# Altium PCB pcb.PcbDoc
Units mil, origin at the board's own origin, x right, y up, seen from the top; angles counter-clockwise.
Board outline 3255 x 4715 mil, 2 copper layers (Top Layer, Bottom Layer); 153 components, 104 nets, 440 pads, 0 vias.
Unrouted connection lines stored in the file: 21.
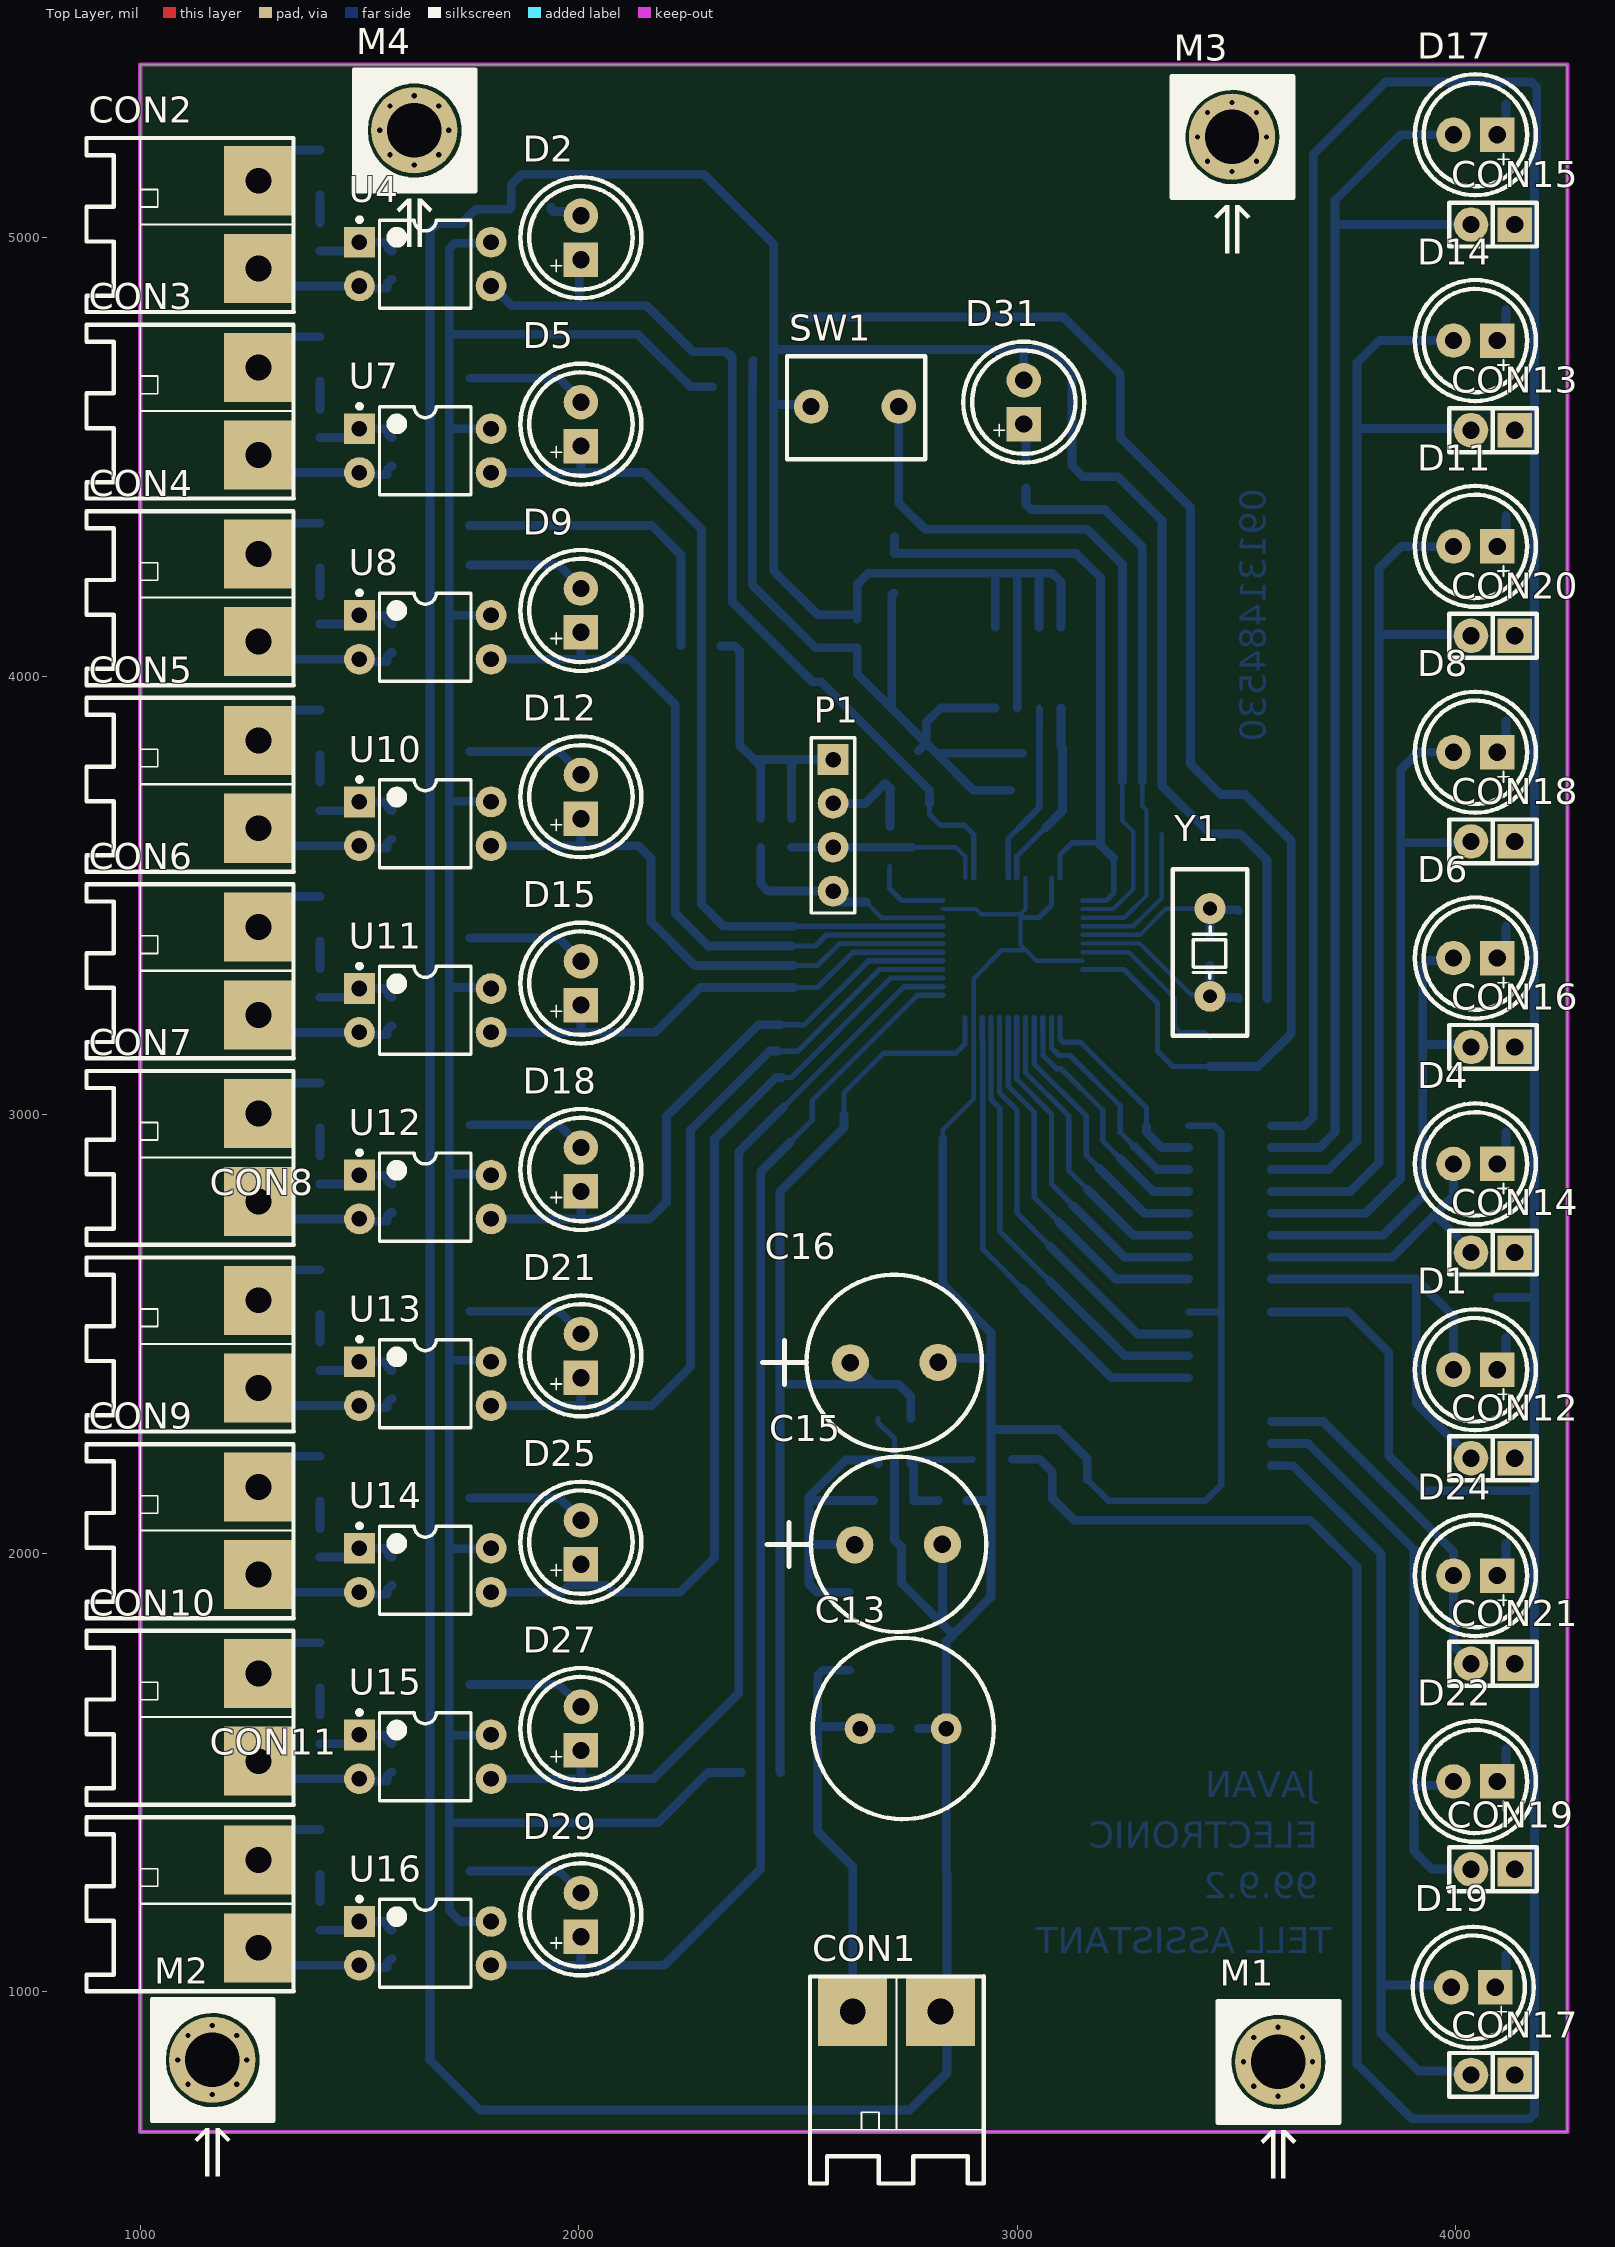
[diagram p0: Top Layer view]
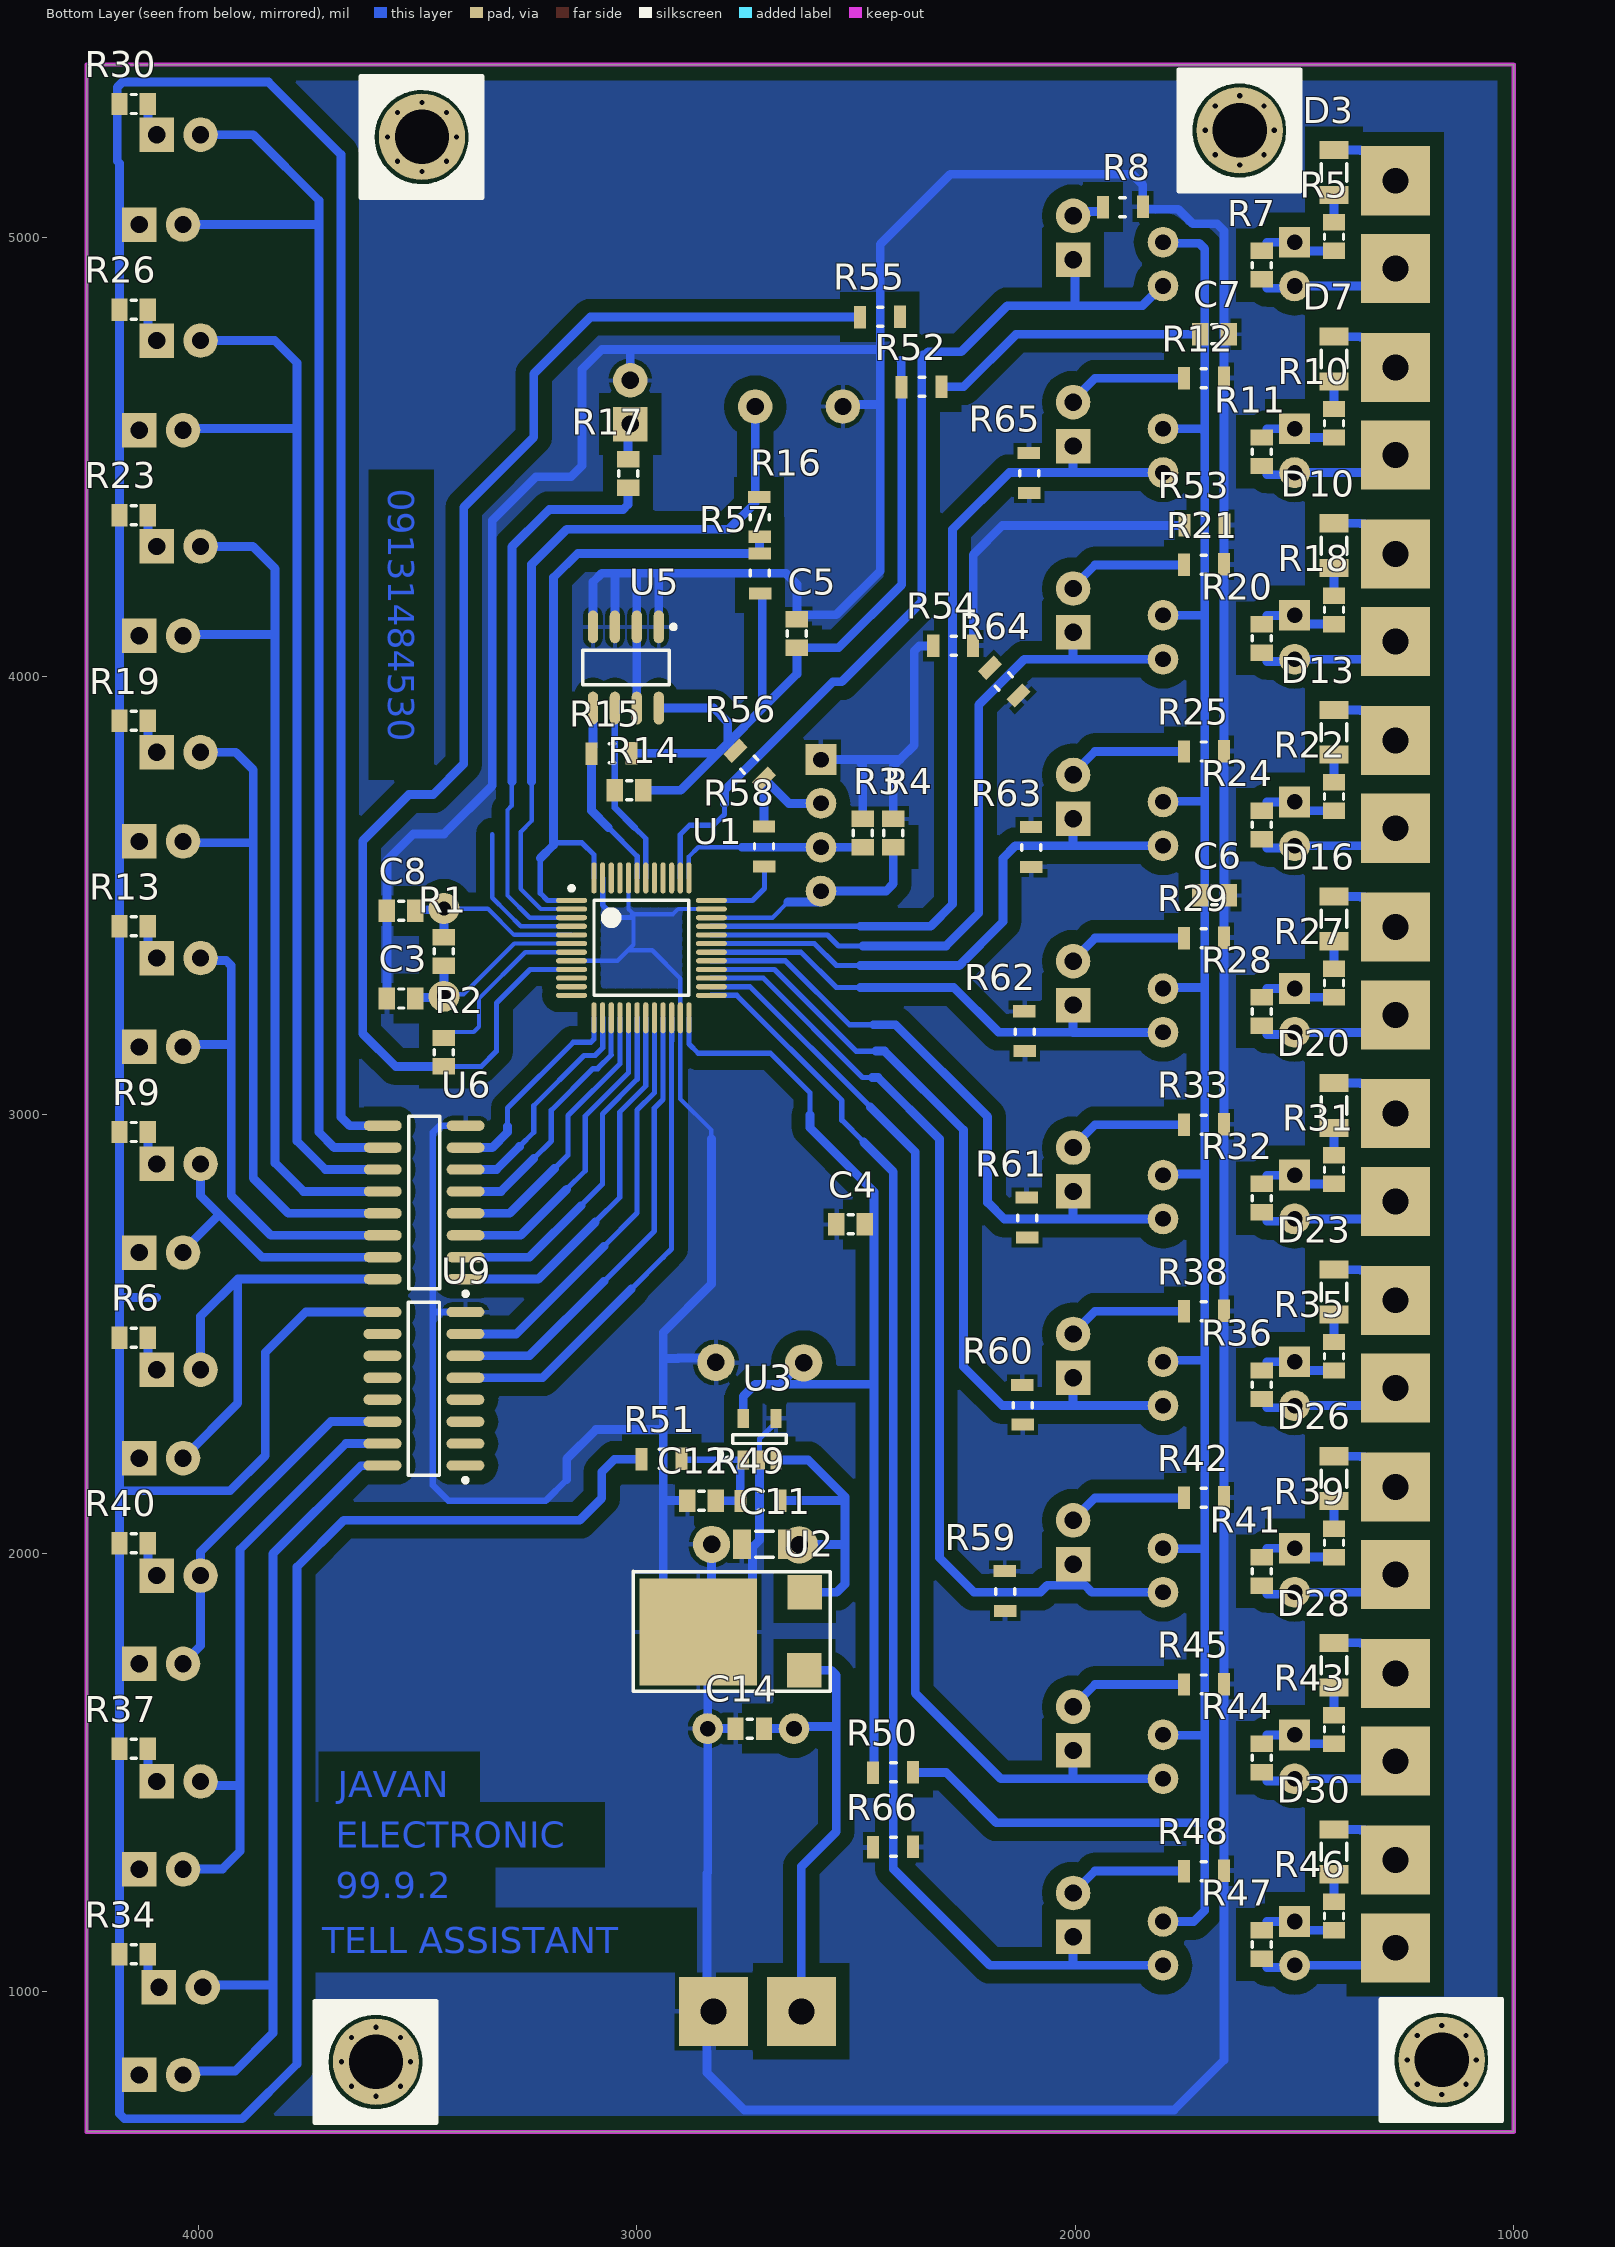
[diagram p1: Bottom Layer view, seen from below]
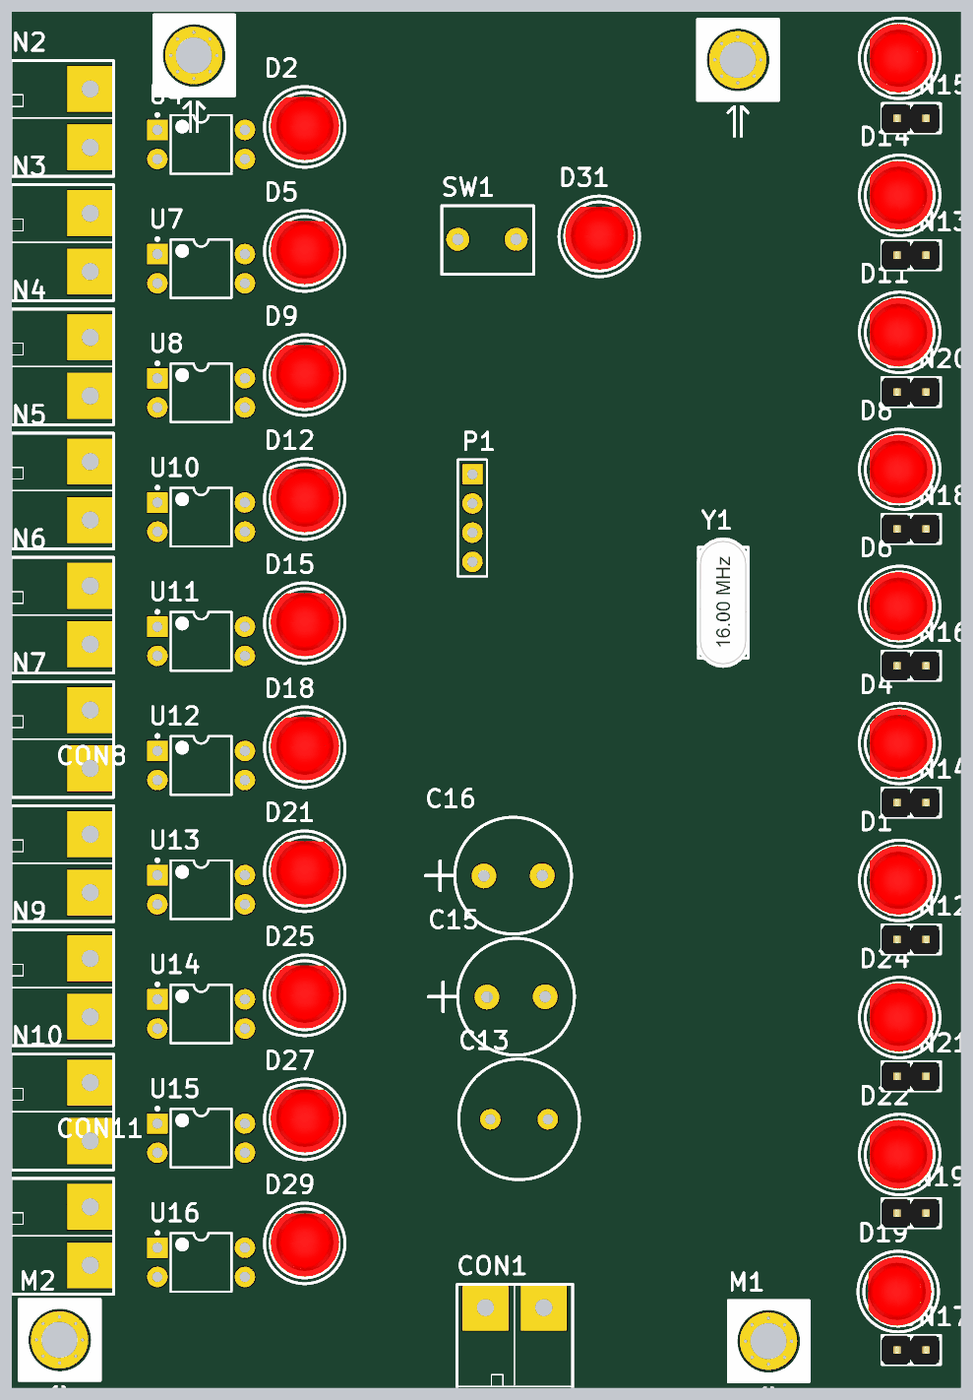
[diagram p2: 3D render of the assembled board from above, using the file's embedded part models]
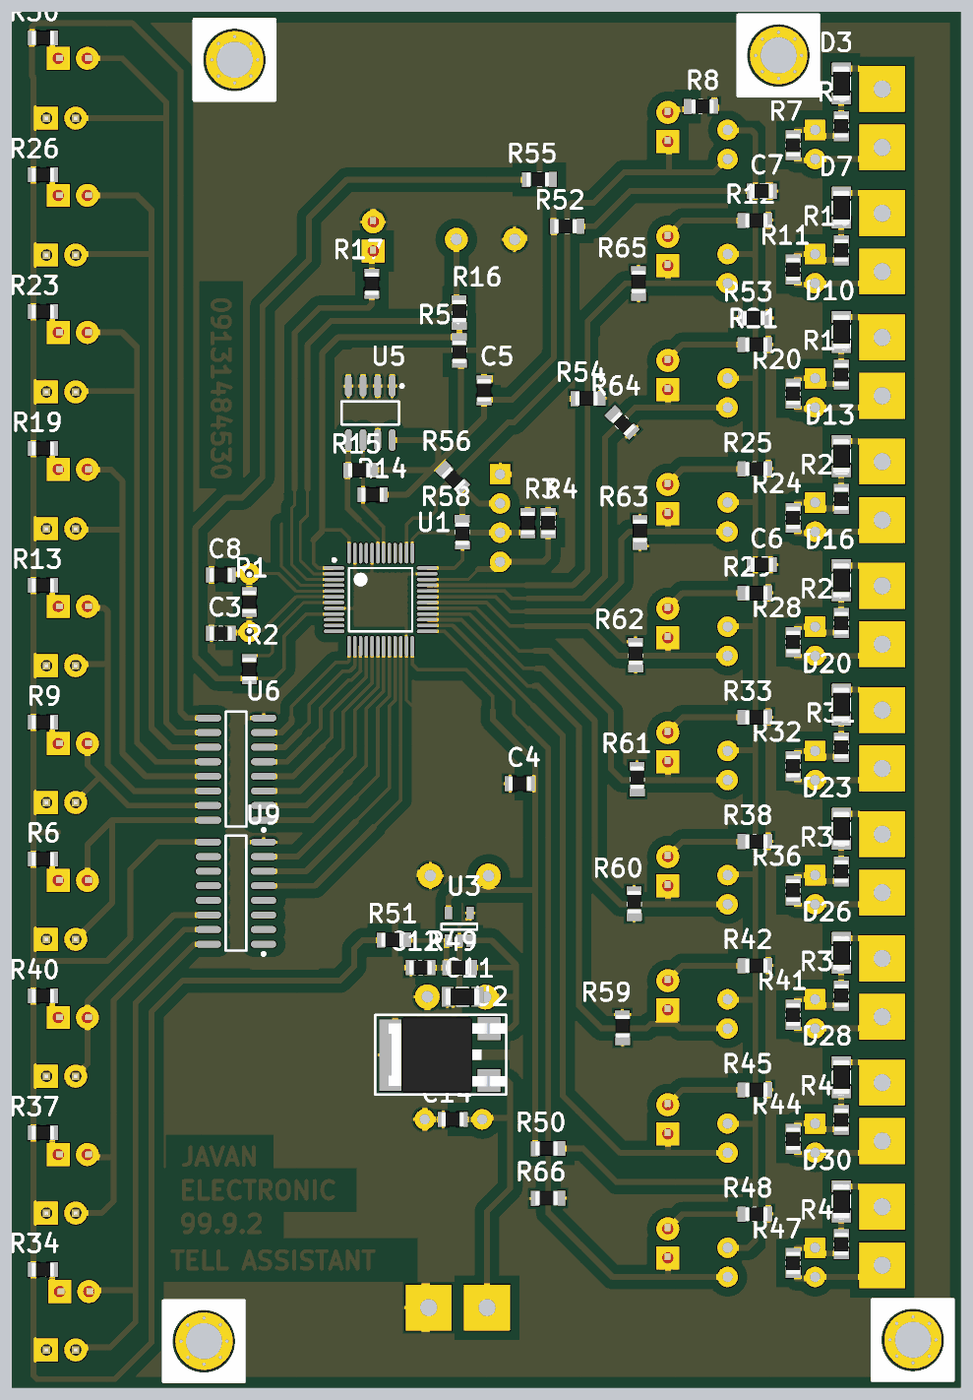
[diagram p3: 3D render of the assembled board from below, using the file's embedded part models]

## Layer stack, top to bottom
Top Solder: solder mask 0.4, Solder Resist, Dk 3.5
Top Layer: signal copper 1.4
Dielectric 1: dielectric 12.6, FR-4, Dk 4.8
Bottom Layer: signal copper 1.4
Bottom Solder: solder mask 0.4, Solder Resist, Dk 3.5

## Board outline
1000,680 4255,680 4255,5395 1000,5395

## Design rules (kind name [scope] priority, off if disabled: settings)
Clearance [All] p1: gap=32 ignorepadtopadclearanceinfootprint=FALSE
PolygonConnect [All] p1: connectstyle=Relief reliefconductorwidth=10 reliefentries=4 polygonreliefangle="90 Angle" airgapwidth=10
RoutingVias [All] p1: holewidth=28 width=50 viastyle="Through Hole" minholewidth=28 minwidth=50 maxholewidth=28 maxwidth=50
SolderMaskExpansion [All] p1: expansion=4 istentingtop=FALSE
Width [All] p1: maxlimit=100 minlimit=10 preferedwidth=20
30 further rules are at their usual default settings.

## Classes and differential pairs
component class comicition: CON2 CON3 CON4 CON5 CON6 CON7 CON8 CON9 CON10 CON11 CON12 CON13 CON14 CON15 CON16 CON17 CON18 CON19 CON20 CON21 D1 D2 D3 D4 D5 D6 D7 D8 D9 D10 D11 D12 D13 D14 D15 D16 D17 D18 D19 D20 D21 D22 D23 D24 D25 D26 D27 D28 D29 D30 R5 R6 R7 R8 R9 R10 R11 R12 R13 R18 R19 R20 R21 R22 R23 R24 R25 R26 R27 R28 R29 R30 R31 R32 R33 R34 R35 R36 R37 R38 R39 R40 R41 R42 R43 R44 R45 R46 R47 R48 U4 U6 U7 U8 U9 U10 U11 U12 U13 U14 U15 U16
component class key: R16 SW1
component class power: C11 C12 C13 C14 C15 C16 CON1 U2 U3
component class Memory: R14 R15 U5
component class main: C3 C4 C5 C6 C7 C8 D31 M1 M2 M3 M4 P1 R1 R2 R3 R4 R17 R49 R50 R51 R52 R53 R54 R55 R56 R57 R58 R59 R60 R61 R62 R63 R64 R65 R66 U1 Y1

## Components (designator, comment, footprint, x,y, rotation, side; value= is the part's Value field where it differs from the comment)
C3 "" "RES 0805 (2012X06L)" 3505.04,3265 r0 bottom value=20pf
C4 "" "RES 0805 (2012X06L)" 2545,2750 r180 bottom
C5 "" "RES 0805 (2012X06L)" 2635,4130 r270 bottom
C6 "" "RES 0805 (2012X06L)" 1650,3500 r0 bottom
C7 "" "RES 0805 (2012X06L)" 1650,4780 r0 bottom
C8 "" "RES 0805 (2012X06L)" 3505,3465 r0 bottom value=20pf
C11 "Non Polarity" "RES 1206 (3216X08L)" 2760,2020 r180 bottom
C12 "Non Polarity" "RES 0805 (2012X06L)" 2884.96,2120 r180 bottom
C13 "Polarity" RB5-10.5 2740,1600 r0 top
C14 "Non Polarity" "RES 0805 (2012X06L)" 2775,1600 r180 bottom
C15 "Polarity" RB5-10 2730,2020 r180 top
C16 "Polarity" RB5-10 2720,2435 r180 top
CON1 "PHOENIX 2" "phonix 2" 2524.88,1035 r0 top
CON2 "PHOENIX 2" "phonix 2" 1350,5230 r270 top
CON3 "PHOENIX 2" "phonix 2" 1350,4804.46 r270 top
CON4 "PHOENIX 2" "phonix 2" 1350,4378.92 r270 top
CON5 "PHOENIX 2" "phonix 2" 1350,3953.37 r270 top
CON6 "PHOENIX 2" "phonix 2" 1350,3527.83 r270 top
CON7 "PHOENIX 2" "phonix 2" 1350,3102.29 r270 top
CON8 "PHOENIX 2" "phonix 2" 1350,2676.75 r270 top
CON9 "PHOENIX 2" "phonix 2" 1350,2251.21 r270 top
CON10 "PHOENIX 2" "phonix 2" 1350,1825.67 r270 top
CON11 "PHOENIX 2" "phonix 2" 1350,1400.12 r270 top
CON12 "PIN 2" "PIN 2" 4135,2216.67 r270 top
CON13 "PIN 2" "PIN 2" 4135,4561.11 r270 top
CON14 "PIN 2" "PIN 2" 4135,2685.56 r270 top
CON15 "PIN 2" "PIN 2" 4135,5030 r270 top
CON16 "PIN 2" "PIN 2" 4135,3154.44 r270 top
CON17 "PIN 2" "PIN 2" 4135,810 r270 top
CON18 "PIN 2" "PIN 2" 4135,3623.33 r270 top
CON19 "PIN 2" "PIN 2" 4135,1278.89 r270 top
CON20 "PIN 2" "PIN 2" 4135,4092.22 r270 top
CON21 "PIN 2" "PIN 2" 4135,1747.78 r270 top
D1 "LED" "led 5mm" 4095,2418.33 r180 top
D2 "LED" "led 5mm" 2005,4950 r90 top
D3 "1N4007" "RES 1206 (3216X08L)" 1410,5200 r270 bottom
D4 "LED" "led 5mm" 4095,2887.78 r180 top
D5 "LED" "led 5mm" 2005,4525 r90 top
D6 "LED" "led 5mm" 4095,3357.22 r180 top
D7 "1N4007" "RES 1206 (3216X08L)" 1410,4774.44 r270 bottom
D8 "LED" "led 5mm" 4095,3826.67 r180 top
D9 "LED" "led 5mm" 2005,4100 r90 top
D10 "1N4007" "RES 1206 (3216X08L)" 1410,4348.89 r270 bottom
D11 "LED" "led 5mm" 4095,4296.11 r180 top
D12 "LED" "led 5mm" 2005,3675 r90 top
D13 "1N4007" "RES 1206 (3216X08L)" 1410,3923.33 r270 bottom
D14 "LED" "led 5mm" 4095,4765.56 r180 top
D15 "LED" "led 5mm" 2005,3250 r90 top
D16 "1N4007" "RES 1206 (3216X08L)" 1410,3497.78 r270 bottom
D17 "LED" "led 5mm" 4095,5235 r180 top
D18 "LED" "led 5mm" 2005,2825 r90 top
D19 "LED" "led 5mm" 4090,1010 r180 top
D20 "1N4007" "RES 1206 (3216X08L)" 1410,3072.22 r270 bottom
D21 "LED" "led 5mm" 2005,2400 r90 top
D22 "LED" "led 5mm" 4095,1479.44 r180 top
D23 "1N4007" "RES 1206 (3216X08L)" 1410,2646.67 r270 bottom
D24 "LED" "led 5mm" 4095,1948.89 r180 top
D25 "LED" "led 5mm" 2005,1975 r90 top
D26 "1N4007" "RES 1206 (3216X08L)" 1410,2221.11 r270 bottom
D27 "LED" "led 5mm" 2005,1550 r90 top
D28 "1N4007" "RES 1206 (3216X08L)" 1410,1795.56 r270 bottom
D29 "LED" "led 5mm" 2005,1125 r90 top
D30 "1N4007" "RES 1206 (3216X08L)" 1410,1370 r270 bottom
D31 "LED" "led 5mm" 3015,4575 r90 top
M1 "Screw" "Board Screw" 3595,840 r0 top
M2 "Screw" "Board Screw" 1164.32,844.32 r0 top
M3 "Screw" "Board Screw" 3490,5230 r0 top
M4 "Screw" "Board Screw" 1625,5245 r0 top
P1 "Header 4" HDR1X4 2580,3810 r270 top
R1 "Res1" "RES 0805 (2012X06L)" 3440,3404.96 r270 bottom value=1M
R2 "" "RES 0805 (2012X06L)" 3440,3175 r270 bottom
R3 "1K" "RES 0805 (2012X06L)" 2485,3610.04 r90 bottom
R4 "1K" "RES 0805 (2012X06L)" 2415,3610.04 r90 bottom
R5 "resistor" "RES 0805 (2012X06L)" 1410,5034.96 r270 bottom value=5K
R6 "resistor" "RES 0805 (2012X06L)" 4115,2491.67 r0 bottom value=1K
R7 "resistor" "RES 0805 (2012X06L)" 1575,4970 r270 bottom value=1K
R8 "resistor" "RES 0805 optional" 1860,5070 r0 bottom value=1K
R9 "resistor" "RES 0805 (2012X06L)" 4115,2960.56 r0 bottom value=1K
R10 "resistor" "RES 0805 (2012X06L)" 1410,4609.41 r270 bottom value=5K
R11 "resistor" "RES 0805 (2012X06L)" 1575,4544.44 r270 bottom value=1K
R12 "resistor" "RES 0805 optional" 1675,4679.44 r0 bottom value=1K
R13 "resistor" "RES 0805 (2012X06L)" 4115,3429.44 r0 bottom value=1K
R14 "Res1" "RES 0805 (2012X06L)" 3050,3740 r180 bottom value=4k7
R15 "Res1" "RES 0805 optional" 3089.16,3824.16 r180 bottom value=4k7
R16 "resistor" "RES 0805 optional" 2720,4395 r270 bottom value=1K
R17 "resistor" "RES 0805 (2012X06L)" 3020,4494.96 r270 bottom value=1K
R18 "resistor" "RES 0805 (2012X06L)" 1410,4183.86 r270 bottom value=5K
R19 "resistor" "RES 0805 (2012X06L)" 4115,3898.33 r0 bottom value=1K
R20 "resistor" "RES 0805 (2012X06L)" 1575,4118.89 r270 bottom value=1K
R21 "resistor" "RES 0805 optional" 1675,4253.89 r0 bottom value=1K
R22 "resistor" "RES 0805 (2012X06L)" 1410,3758.31 r270 bottom value=5K
R23 "resistor" "RES 0805 (2012X06L)" 4115,4367.22 r0 bottom value=1K
R24 "resistor" "RES 0805 (2012X06L)" 1575,3693.33 r270 bottom value=1K
R25 "resistor" "RES 0805 optional" 1675,3828.33 r0 bottom value=1K
R26 "resistor" "RES 0805 (2012X06L)" 4115,4836.11 r0 bottom value=1K
R27 "resistor" "RES 0805 (2012X06L)" 1410,3332.76 r270 bottom value=5K
R28 "resistor" "RES 0805 (2012X06L)" 1575,3267.78 r270 bottom value=1K
R29 "resistor" "RES 0805 optional" 1675,3402.78 r0 bottom value=1K
R30 "resistor" "RES 0805 (2012X06L)" 4115,5305 r0 bottom value=1K
R31 "resistor" "RES 0805 (2012X06L)" 1410,2907.2 r270 bottom value=5K
R32 "resistor" "RES 0805 (2012X06L)" 1575,2842.22 r270 bottom value=1K
R33 "resistor" "RES 0805 optional" 1675,2977.22 r0 bottom value=1K
R34 "resistor" "RES 0805 (2012X06L)" 4115,1085 r0 bottom value=1K
R35 "resistor" "RES 0805 (2012X06L)" 1410,2481.65 r270 bottom value=5K
R36 "resistor" "RES 0805 (2012X06L)" 1575,2416.67 r270 bottom value=1K
R37 "resistor" "RES 0805 (2012X06L)" 4115,1553.89 r0 bottom value=1K
R38 "resistor" "RES 0805 optional" 1675,2551.67 r0 bottom value=1K
R39 "resistor" "RES 0805 (2012X06L)" 1410,2056.1 r270 bottom value=5K
R40 "resistor" "RES 0805 (2012X06L)" 4115,2022.78 r0 bottom value=1K
R41 "resistor" "RES 0805 (2012X06L)" 1575,1991.11 r270 bottom value=1K
R42 "resistor" "RES 0805 optional" 1675,2126.11 r0 bottom value=1K
R43 "resistor" "RES 0805 (2012X06L)" 1410,1630.55 r270 bottom value=5K
R44 "resistor" "RES 0805 (2012X06L)" 1575,1565.56 r270 bottom value=1K
R45 "resistor" "RES 0805 optional" 1675,1700.56 r0 bottom value=1K
R46 "resistor" "RES 0805 (2012X06L)" 1410,1205 r270 bottom value=5K
R47 "resistor" "RES 0805 (2012X06L)" 1575,1140 r270 bottom value=1K
R48 "resistor" "RES 0805 optional" 1675,1275 r0 bottom value=1K
R49 "resistor" "RES 0805 optional" 2750,2120 r180 bottom value=0R
R50 "resistor" "RES 0805 optional" 2447,1500 r180 bottom value=0R
R51 "resistor" "RES 0805 optional" 2975,2215 r180 bottom value=0R
R52 "resistor" "RES 0805 optional" 2382,4660 r180 bottom value=0R
R53 "resistor" "RES 0805 optional" 1737,4345 r180 bottom value=0R
R54 "resistor" "RES 0805 optional" 2310,4070 r180 bottom value=0R
R55 "resistor" "RES 0805 optional" 2477,4820 r180 bottom value=0R
R56 "resistor" "RES 0805 optional" 2720.55,3775.55 r45 bottom value=0R
R57 "resistor" "RES 0805 optional" 2720,4203 r90 bottom value=0R
R58 "resistor" "RES 0805 optional" 2710,3580 r90 bottom value=0R
R59 "resistor" "RES 0805 optional" 2160,1945 r270 bottom value=0R
R60 "resistor" "RES 0805 optional" 2120,2370 r270 bottom value=0R
R61 "resistor" "RES 0805 optional" 2110,2797 r270 bottom value=0R
R62 "resistor" "RES 0805 optional" 2115,3222 r270 bottom value=0R
R63 "resistor" "RES 0805 optional" 2100,3642 r270 bottom value=0R
R64 "resistor" "RES 0805 optional" 2140,3965 r45 bottom value=0R
R65 "resistor" "RES 0805 optional" 2105,4495 r270 bottom value=0R
R66 "resistor" "RES 0805 optional" 2447,1330 r180 bottom value=0R
SW1 "SW 2pin" "SW 2PIN" 2730,4615 r180 top
U1 "STM32F103C8T6" STM-LQFP48_N 2989.45,3380.47 r180 bottom
U2 "7805" "reg SMD1A small" 2860,1820 r90 bottom
U3 "LN1134A332MR" SOT23-5_N 2720,2260 r90 bottom
U4 "Optoisolator1" DIP-4 1650,4940 r0 top
U5 "24C02C-I/SN" SOIC-SN8_L 3025,4020 r270 bottom
U6 "ULN2003AD" D016_N 3485,2800 r0 bottom
U7 "Optoisolator1" DIP-4 1650,4514.44 r0 top
U8 "Optoisolator1" DIP-4 1650,4088.89 r0 top
U9 "ULN2003AD" D016_N 3485.51,2375 r0 bottom
U10 "Optoisolator1" DIP-4 1650,3663.33 r0 top
U11 "Optoisolator1" DIP-4 1650,3237.78 r0 top
U12 "Optoisolator1" DIP-4 1650,2812.22 r0 top
U13 "Optoisolator1" DIP-4 1650,2386.67 r0 top
U14 "Optoisolator1" DIP-4 1650,1961.11 r0 top
U15 "Optoisolator1" DIP-4 1650,1535.56 r0 top
U16 "Optoisolator1" DIP-4 1650,1110 r0 top
Y1 "XTAL" Xtal 3440,3470 r270 top

## Footprints (in the part's own frame and the unit in brackets; to place one, negate y for a bottom-side part, rotate by r counter-clockwise, add the part's x,y. Pads: shape width x height; smd on the part's side, far side on the other; paste and mask are expansions set on the pad)
"Board Screw" [mm]
  round 0.6 hole 0.3: S(-2,0) S(-1.414,-1.414) S(-1.414,1.414) S(0,-2) S(0,2) S(1.414,-1.414) S(1.414,1.414) S(2,0)
  round 5 hole 3.15 mask+0.1: S(0,0)
  silkscreen extent -3.49,-6.75 3.56,3.52
D016_N [mm] "SOIC, 16-Leads, Body 9.9x3.9mm, Pitch 1.27mm, IPC Medium Density"
  oval 2.2x0.6 smd: 1(-2.4,4.445) 2(-2.4,3.175) 3(-2.4,1.905) 4(-2.4,0.635) 5(-2.4,-0.635) 6(-2.4,-1.905) 7(-2.4,-3.175) 8(-2.4,-4.445) 9(2.4,-4.445) 10(2.4,-3.175) 11(2.4,-1.905) 12(2.4,-0.635) 13(2.4,0.635) 14(2.4,1.905) 15(2.4,3.175) 16(2.4,4.445)
  silkscreen extent -2.52,-5 0.9,5.42, body extent -2,-5 2,5, height 1.75
DIP-4 [mm] "DIP; 4 Leads; Row Spacing 7.62 mm; Pitch 2.54 mm"
  rect 1.781x1.781 hole 0.9: 1(-3.81,1.27)
  round 1.781 hole 0.9: 2(-3.81,-1.27) 3(3.81,-1.27) 4(3.81,1.27)
  silkscreen extent -3.93,-2.55 2.65,2.69, body extent -3.15,-2.5 3.15,2.5, height 5.6
HDR1X4 [mm] "Connector; Header; 4 Position"
  rect 1.781x1.781 hole 0.9: 1(0,0)
  round 1.781 hole 0.9: 2(2.54,0) 3(5.08,0) 4(7.62,0)
  silkscreen extent -1.27,-1.27 8.89,1.27
"led 5mm" [mm]
  rect 2x2 hole 1: 1(0,0)
  round 2 hole 1: 2(2.54,0)
  silkscreen extent -2.24,-3.51 4.78,3.51, body extent -1.64,-3.02 3.86,2.98, height 9.04
"phonix 2" [mm]
  rect 4x4 hole 1.5: 1(2.54,-2.032) 2(7.623,-2.032)
  silkscreen extent 0.06,-12 10.14,0
"PIN 2" [mm]
  rect 2x2 hole 1: 1(0,0)
  round 2 hole 1: 2(0,-2.54)
  silkscreen extent -1.27,-3.81 1.27,1.27, body extent -1.24,-3.88 1.26,1.2, height 8.2
RB5-10 [mil]
  round 85 hole 40: 1(100.41,1) 2(-99.59,0)
  silkscreen extent -200,-200 300,200
RB5-10.5 [mm] "Capacitor (Radial); 2 Leads"
  round 1.781 hole 0.9: 1(-2.5,0) 2(2.5,0)
  silkscreen extent -5.25,-5.25 5.25,5.25
"reg SMD1A small" [mm]
  rect 2x2 smd: 1(-2.21,-6.147) 3(2.311,-6.172)
  rect 6.2x6.8 smd: 2(0,0)
  silkscreen extent -3.43,-7.65 3.51,3.76, body extent -3.27,-7.65 3.33,2.58, height 2.31
"RES 0805 (2012X06L)" [mm] "Chip Resistor, 2-Leads, Body 2.0x1.3mm, IPC High Density _ (0.100 W)"
  rect 0.95x1.3 smd: 1(0,0) 2(1.65,0)
  silkscreen extent 0.67,-0.55 0.97,0.55, body extent -0.19,-0.63 1.84,0.64, height 0.6
"RES 0805 optional" [mm] "Chip Resistor, 2-Leads, Body 2.0x1.3mm, IPC High Density _ (0.100 W)"
  rect 0.7x1.3 smd: 1(-0.356,-0.025) 2(1.956,0)
  silkscreen extent 0.67,-0.55 0.97,0.55, body extent -0.36,-0.63 1.68,0.64, height 0.6
"RES 1206 (3216X08L)" [mm] "Chip Resistor, 2-Leads, Body 3.2x1.6mm, IPC High Density _ (0.125 W)"
  rect 1.05x1.7 smd: 1(0,0) 2(2.596,0)
  silkscreen extent 0.8,-0.75 1.8,0.75, body extent -0.23,-0.76 2.82,0.76, height 0.6
SOIC-SN8_L [mm] "SOIC, 8-Leads, Body 4.9x3.8mm, Pitch 1.27mm, IPC High Density"
  oval 1.9x0.6 smd: 1(-2.35,1.905) 2(-2.35,0.635) 3(-2.35,-0.635) 4(-2.35,-1.905) 5(2.35,-1.905) 6(2.35,-0.635) 7(2.35,0.635) 8(2.35,1.905)
  silkscreen extent -2.47,-2.5 1,2.88, body extent -2,-2.5 2,2.5, height 1.75
SOT23-5_N [mm] "SOT23, 5-Leads, Body 2.9x1.6mm, Pitch 0.95mm, Lead Span 2.8mm, IPC Medium Density"
  rect 1.1x0.65 smd: 1(-1.2,0.95) 2(-1.2,0) 3(-1.2,-0.95) 4(1.2,-0.95) 5(1.2,0.95)
  silkscreen extent -1.32,-1.55 0.25,1.95, body extent -0.9,-1.55 0.9,1.55, height 1.4
STM-LQFP48_N [mm] "QFP, 48-Leads, Body 7x7mm, Pitch 0.5mm, IPC Medium Density"
  oval 1.8x0.3 smd: 1(-4.05,2.75) 2(-4.05,2.25) 3(-4.05,1.75) 4(-4.05,1.25) 5(-4.05,0.75) 6(-4.05,0.25) 7(-4.05,-0.25) 8(-4.05,-0.75) 9(-4.05,-1.25) 10(-4.05,-1.75) 11(-4.05,-2.25) 12(-4.05,-2.75) 25(4.05,-2.75) 26(4.05,-2.25) 27(4.05,-1.75) 28(4.05,-1.25) 29(4.05,-0.75) 30(4.05,-0.25) 31(4.05,0.25) 32(4.05,0.75) 33(4.05,1.25) 34(4.05,1.75) 35(4.05,2.25) 36(4.05,2.75)
  oval 0.3x1.8 smd: 13(-2.75,-4.05) 14(-2.25,-4.05) 15(-1.75,-4.05) 16(-1.25,-4.05) 17(-0.75,-4.05) 18(-0.25,-4.05) 19(0.25,-4.05) 20(0.75,-4.05) 21(1.25,-4.05) 22(1.75,-4.05) 23(2.25,-4.05) 24(2.75,-4.05) 37(2.75,4.05) 38(2.25,4.05) 39(1.75,4.05) 40(1.25,4.05) 41(0.75,4.05) 42(0.25,4.05) 43(-0.25,4.05) 44(-0.75,4.05) 45(-1.25,4.05) 46(-1.75,4.05) 47(-2.25,4.05) 48(-2.75,4.05)
  silkscreen extent -4.18,-2.75 2.75,3.57, body extent -3.5,-3.5 3.5,3.5, height 1.6
"SW 2PIN" [mm]
  round 2 hole 1: 1(0,0) 2(5.08,0)
  silkscreen extent -1.52,-2.92 6.48,3.05
Xtal [mm]
  round 1.8 hole 0.8: 1(0,0) 2(5.08,0)
  silkscreen extent -2.29,-2.16 7.37,2.16, body extent -3.14,-2.34 8.21,2.31, height 3.6

## Part data
C3 C4 C5 C6 C7 C8: library part Cap, "Capacitor", LatestRevisionDate=17-Jul-2002, LatestRevisionNote="Re-released for DXP Platform.", PackageReference=RAD-0.3, Published=8-Jun-2000, Publisher="Altium Limited"
C11 C12 C14: library part Cap, Valu=100nf
C13 C15 C16: library part Cap_Polarity
  C13: Valu="1000uf 25v"
  C15 C16: Valu=1000uf6.3v
M1 M2 M3 M4: library part Pich, "Board Screw With Spacer"
P1: "Header, 4-Pin", LatestRevisionDate=17-Jul-2002, LatestRevisionNote="Re-released for DXP Platform.", Publisher="Altium Limited"
R1 R14 R15: "Resistor", LatestRevisionDate=17-Jul-2002, LatestRevisionNote="Re-released for DXP Platform.", PackageReference=AXIAL-0.3, Published=8-Jun-2000, Publisher="Altium Limited"
R2: library part resistor, valv=10K
R3 R4: library part Resistor, "Resistor", Power="1/8 W", Tolerance=5%
U1: "ARM Cortex-M3 32-bit MCU, 64 KB Flash, 20 KB Internal RAM, 37 I/Os, 48-pin LQFP, -40 to 85 degC, Tray", I/Os (High Current)=37, Operating Frequency(F) (Processor speed) (MHz)=72, Supplier Part Number 1=497-6063-ND, Supply Voltage(Vcc) min (V)=2, A/D Converter="2x12-bit (10 Channel)", ComponentLink1Description="Manufacturer URL", ComponentLink1URL=http://www.st.com/web/en/home.html, ComponentLink2Description=Datasheet, ComponentLink2URL=http://www.st.com/st-web-ui/static/active/en/resource/technical/document/datasheet/CD00161566.pdf, ComponentLink3Description="Package Specification", ComponentLink3URL=http://www.st.com/st-web-ui/static/active/en/resource/technical/document/datasheet/DM00058181.pdf, Core="ARM Cortex-M3", DatasheetVersion="Rev. 16", FLASH Size (Prog) (kB)=64, Internal RAM Size (kB)=20, Mounting Technology="Surface Mount", PackageDescription="48-Pin Low Profile Quad Flat Package, 7 x 7 mm Body, 0.5 mm Pitch", PackageReference=LQFP48, PackageVersion="Rev. 6, 06/2013", Packing=Tray, PartNumber=STM32F103C8T6, Supplier 1=Digi-Key, Supplier 2=Farnell, Supplier 3=Newark, Supplier 4=Newark, Supplier 5=Mouser, Supplier Part Number 2=1447637, Supplier Part Number 3=59M2182, Supplier Part Number 4=57P1222, Supplier Part Number 5=511-STM32F103C8T6
U2: library part 78XX
U3: Output Current=300mA, Voltage - Input (Max)=7v, Voltage - Output (Fixed)=3.3v, PackageDescription="5-Pin Small Outline Transistor Package, Body 2.9 x 1.6 mm, Pitch 0.95 mm"
U4 U7 U8 U10 U11 U12 U13 U14 U15 U16: "4-Pin Phototransistor Optocoupler", DatasheetVersion=Nov-2003, LatestRevisionDate=04-Mar-2005, LatestRevisionNote="Sch pins 3 & 4 Swapped.", PackageReference=DIP-4, Published=24-Mar-1999, Publisher="Altium Limited"
U5: "2Kbit, 400kHz, 5V, I2C Serial EEPROM, 8-Pin SOIC 150mil, Industrial Temperature", Supplier Part Number 1=24C02C-I/SN-ND, Code_IPC=SOIC127P600-8, Code_JEDEC=MS-012, ComponentLink1Description=Datasheet, ComponentLink1URL=http://ww1.microchip.com/downloads/en/DeviceDoc/21202J.pdf, ComponentLink2Description="Packaging Specification", ComponentLink2URL=http://www.microchip.com/stellent/groups/techpub_sg/documents/packagingspec/en012702.pdf, ComponentLink3Description="Microchip.com Home", ComponentLink3URL=http://www.microchip.com/, DatasheetVersion="revJ, Aug-2008", PackageDescription="8-Lead Plastic Small Outline (SN) - Narrow, 3.90mm Body [SOIC]", PackageReference=SOIC-SN8, PackageVersion="revBB, Aug-2009", Published=29-Jan-2009, Publisher="Altium Limited", Supplier 1=Digi-Key, Supplier 2=Farnell, Supplier Part Number 2=1084339
U6 U9: "Darlington Transistor Array", Code_IPC=SOIC127P600-16, ComponentLink1Description="Manufacturer Link", ComponentLink1URL=http://www.ti.com/, ComponentLink2Description=Datasheet, ComponentLink2URL=http://www-s.ti.com/sc/ds/uln2002a.pdf, DatasheetVersion=Sep-1986, LatestRevisionDate=13-Apr-2006, LatestRevisionNote="IPC-7351 Footprint Added.", PackageDescription="16-Pin Small Outline Integrated Circuit 1.27 mm Pitch", PackageReference=D016, PackageVersion=Jan-1998, Published=15-May-2002, Publisher="Altium Limited"
Y1: =8.00MHZ

## Nets (pads, with @x,y where several pads share a name; then routed paths per layer and width w, separated by ;. In a path a pad name is that pad's centre, name@x,y a point inside that pad or via, vN(x,y) a via of type N, cw(c..) or ccw(c..) an arc to the next point about the centre after c; other vN are vias at no path point)
3.3v: C4.2 C5.2 C6.2 C7.2 C16.1 P1.2 R2.2 R14.2 R15.2 R16.2 R50.1 R50.2 R52.1 R52.2 R55.1 R55.2 R56.1 R56.2 R57.1 R57.2 R58.1 R58.2 U1.1 U1.9 U1.24 U1.36 U1.48 U3.5 U4.4 U5.8 U7.4 U8.4 U10.4 U11.4 U12.4 U13.4 U14.4 U15.4 U16.4 | length 15663.4
  Bottom Layer w12: 2605,3000 2605,3050 2695,3140 2860,3140 2881.18,3161.18 U1.24 ; R58.1 2709,3516 2736.26,3488.74 U1.36 ; U1.48 3097.72,3592.72 3125,3620 3190,3620 ; U1.9 3243.74,3331.26 3320,3255 3320,3145 3354.96,3110.04 R2.2 ; U1.1 3203.74,3488.74 3220,3505 3220,3585
  Bottom Layer w20: C7.2 2135,4780 2255,4660 R52.2 ; U4.4@1792.53,4987.5 1717.5,4987.5 1705,4975 1705,4780 1705,4564.44 1705,4556.94 ; U4.4@1792.53,4997.47 U4.4 ; U16.4 1730,1160 1705,1185 1705,1385 ; U15.4 1799.44,1585 1705,1585 ; U14.4 1798.89,2010 1705,2010 ; U13.4 1796.67,2440 1705,2440 ; U12.4 1797.22,2865 1705,2865 ; U11.4 1797.78,3290 1705,3290 ; U10.4 1798.33,3715 1705,3715 ; U8.4 1705,4138.89 ; U7.4 1712.5,4564.44 1705,4556.94 ; R50.2 2295,1500 2180,1385 1705,1385 ; 2398,4720 2397,4719 2397,4660 R52.1 2396,4209 2539.96,4065.04 C5.2 2635,4005 2713.75,3926.25 ; R50.1 2459,1501 2459,2385 ; R55.1 3106,4819 3235,4690 3235,4545 3395,4385 3395,3800 3465,3730 3520,3730 3625,3625 3625,3185 3550.04,3110.04 R2.2 ; P1.2 2653.59,3710 2699.29,3755.71 2710,3745 R58.2 ; 2605,3000 2605,2970 2459,2824 2459,2385 ; C16.1 2624.12,2434 2673.12,2385 ; R57.1 2717.53,4189 2713.75,4185.22 2713.75,3926.25 ; R16.2 R57.2 3135,4280 3190,4225 3190,3620 3190,3615 3220,3585 ; U3.5 2757.4,2357.6 2730,2385 2673.12,2385 ; R56.2 2792.5,3847.5 ; U5.8 2825,3927.48 2792.5,3894.98 2792.5,3847.5 ; R14.2 2900,3740 2815.84,3824.16 ; R15.2 2815.84,3824.16 ; 1705,1385 1705,1585 ; 1705,1585 1705,2010 ; 1705,2010 1705,2440 ; 1705,2440 1705,2865 ; 1705,2865 1705,3290 ; 1705,3290 1705,3500 1705,3715 ; 1705,3715 1705,4138.89 ; 1705,4138.89 1705,4556.94 ; 2459,2385 2673.12,2385 ; 2713.75,3926.25 2792.5,3847.5 ; 2792.5,3847.5 2815.84,3824.16
5v: C11.2 C12.2 C15.1 CON12.1 CON13.1 CON14.1 CON15.1 CON16.1 CON17.1 CON18.1 CON19.1 CON20.1 CON21.1 R6.2 R9.2 R13.2 R19.2 R23.2 R26.2 R30.2 R34.2 R37.2 R40.2 R49.1 R49.2 R51.1 R51.2 U2.3 U3.1 U3.3 U6.9 U9.9 | length 12071.2
  Bottom Layer w15: U3.1 2895.76,2212.76 R51.2
  Bottom Layer w20: U2.3 2544,1911 2525,1930 2525,2020 ; C15.1 2628.59,2020 2525,2020 ; R49.2 2533.28,2120 2525,2128.28 ; U3.3@2682.6,2203.9 U3.3 2609.47,2212.76 2525,2128.28 ; U3.1 2757.4,2203.9 2764,2197.3 R49.1 2764.5,2119.5 2819.5,2119.5 C12.2 ; R51.1 3051,2214 3080,2185 3080,2125 3130,2075 3668.33,2075 3775,1968.33 3775,835 3900,710 4168.28,710 4180,721.72 4180,1100 R37.2 4180,1700 R40.2 4180,2145 ; U6.9 3655,2975 3675,2995 3675,5190 3840,5355 4173.28,5355 4185,5343.28 4185,5305 4185,5175 4180,5170 4180,4865 R26.2 4180,4785 4180,4395 R23.2@4180,4350 ; U9.9 3755,2550 3847.5,2457.5 3847.5,2222.5 3927.78,2142.22 4095,2142.22 4177.22,2142.22 4180,2145 ; 4095,2583.33 4176.67,2583.33 4180,2580 ; R23.2@4177.78,4347.78 R23.2@4180,4350 ; 2525,2020 2525,2128.28 ; 4180,2145 4180,2500 4180,2580 ; 4180,2580 4180,2980 4180,3025 R13.2 4180,3470 4180,3910 R23.2@4180,4350
12V: C13.1 C14.2 CON1.1 U2.1 | length 1044.3
  Bottom Layer w20: U2.1 2556.72,1733 2545,1721.28 2545,1605 ; CON1.1 2624.88,1285.12 2545,1365 2545,1605 ; C14.2 C13.1 2636.57,1605 2545,1605
GND: C3.2 C4.1 C5.1 C6.1 C7.1 C8.2 C11.1 C12.1 C13.2 C14.1 C15.2 C16.2 CON1.2 D31.2 P1.1 R3.2 R4.2 R8.1 R12.1 R21.1 R25.1 R29.1 R33.1 R38.1 R42.1 R45.1 R48.1 R53.1 R53.2 R54.1 R54.2 R59.1 R59.2 R60.1 R60.2 R61.1 R61.2 R62.1 R62.2 R63.1 R63.2 R64.1 R64.2 R65.1 R65.2 R66.1 R66.2 SW1.2 U1.8 U1.23 U1.35 U1.44 U1.47 U2.2 U3.2 U3.4 U5.1 U5.2 U5.3 U5.4 U5.7 U6.8 U9.8 | length 18589.8
  Bottom Layer w10: 2830,2945 2830,2965 2900.87,3035.87 U1.23 2900.87,3310.87 2965,3375 3020,3375 ; U1.35 2905.94,3469.06 2917.5,3457.5 3007.5,3457.5 ; U1.44 3018.98,3468.98 3007.5,3457.5 ; U1.8 3044.06,3350.94 3020,3375 ; 3007.5,3457.5 3007.5,3387.5 3020,3375
  Bottom Layer w12: U3.4 2682.6,2298.39 2720,2260.98 U3.2 ; 3007.5,3457.5 3015,3450 3050,3450 3078.03,3478.03 U1.47
  Bottom Layer w15: 3160,2167.5 3207.5,2120 3430,2120 3465,2155 3465,2555 ; U6.8 3450,2975 3465,2960 3465,2555 ; U9.8 3460,2550 3465,2555
  Bottom Layer w20: R53.1 2166,4344 2233,4277 R54.2 ; R54.1 2324.06,4068.94 2356.06,4068.94 2367.5,4057.5 2367.5,3842.5 2400,3810 ; R4.2 2415,3795 2400,3810 ; R3.2 2485,3798.28 2496.72,3810 ; SW1.2 2525,4620 2445,4620 ; P1.1 2496.72,3810 ; C5.1 C5.1@2635,4140 ; U3.2 2720,2030 2736.14,2013.86 2736.14,1932.05 2823.69,1844.5 2848.19,1820 U2.2 2940,1900 2940,2120 ; C14.1 C13.2 ; C16.2 2829.59,2445 2905,2445 2905.86,2444.14 2940,2444.14 ; U2.2@2829.59,1850.41 C15.2 ; 2830,2945 2830,2613.28 2940,2503.28 2940,2444.14 ; U2.2@2854.09,1814.09 2838.43,1798.43 C13.2 ; C12.1 2940,2120 ; U5.1 2950,4230 2945,4235 ; U5.7 U5.2 3000,4230 2995,4235 ; D31.2 3015,4745 ; U5.3 3050,4230 3045,4235 ; U5.4 3100,4215 3080,4235 3045,4235 ; 3160,2167.5 3160,2215 3092.93,2282.07 2940,2282.07 ; C8.2 3569.96,3580.04 3510,3640 3440,3640 3330,3750 3330,4355 3230,4455 3150,4455 3125,4480 3125,4700 3080,4745 3015,4745 ; C3.2 C8.2 ; 2400,3810 2496.72,3810 ; 2445,4620 2445,4745 ; 2445,4620 2445,4240 2545,4140 C5.1@2635,4140 ; 2445,4745 3015,4745 ; 2445,4745 2445,4985 2285,5145 1870,5145 1846,5121 R8.1 1846,5068.78 1842.22,5065 1765,5065 1732,5032 1677,5032 1661,5016 1661,4780 R12.1 1661,4345 R21.1 R25.1 1661,3500 R29.1 R33.1 R38.1 R42.1 R45.1 R48.1 1661,844 1775,730 2755,730 2840.12,815.12 2840.12,955 2840.12,1270 2838.43,1271.7 C13.2 ; C5.1@2635,4140 2635,4210 2660,4235 2945,4235 ; 2940,2120 2940,2282.07 ; 2940,2282.07 2940,2444.14 ; 2945,4235 2995,4235 ; 2995,4235 3045,4235
LED1: R17.2 U1.3 | length 1309.6
  Bottom Layer w10: U1.3 3244.37,3449.37 3295,3500 3295,3695 3285,3705 3285,3760
  Bottom Layer w20: R17.2 3020,4391.72 3031.72,4380 3200,4380 3209.97,4370.03 3285,4295 3285,3760
NetCON2_1: CON2.1 D3.1 | length 168.9
  Bottom Layer w20: CON2.1 1338.74,5198.74 1349.32,5198.74 1350.46,5199.87 D3.1@1410,5199.87
NetCON2_2: CON2.2 R7.2 U4.2 | length 338.6
  Bottom Layer w20: CON2.2 1310,4889.87 1500,4889.87 1505,4884.87 1563.28,4884.87 1563.28,4896.21 1571.98,4904.91 R7.2@1575,4904.91
NetCON3_1: CON3.1 D7.1 | length 168.9
  Bottom Layer w20: CON3.1 1338.74,4773.2 1349.32,4773.2 1350.46,4774.33 D7.1@1410,4774.33
NetCON3_2: CON3.2 R11.2 U7.2 | length 338.6
  Bottom Layer w20: CON3.2 1310,4464.33 1500,4464.33 1505,4459.33 1563.28,4459.33 1563.28,4470.67 1571.98,4479.37 R11.2@1575,4479.37
NetCON4_1: CON4.1 D10.1 | length 168.9
  Bottom Layer w20: CON4.1 1338.74,4347.66 1349.32,4347.66 1350.46,4348.79 D10.1@1410,4348.79
NetCON4_2: CON4.2 R20.2 U8.2 | length 338.6
  Bottom Layer w20: CON4.2 1310,4038.79 1500,4038.79 1505,4033.79 1563.28,4033.79 1563.28,4045.13 1571.98,4053.83 R20.2@1575,4053.83
NetCON5_1: CON5.1 D13.1 | length 168.9
  Bottom Layer w20: CON5.1 1338.74,3922.11 1349.32,3922.11 1350.46,3923.25 D13.1@1410,3923.25
NetCON5_2: CON5.2 R24.2 U10.2 | length 338.6
  Bottom Layer w20: CON5.2 1310,3613.25 1500,3613.25 1505,3608.25 1563.28,3608.25 1563.28,3619.59 1571.98,3628.29 R24.2@1575,3628.29
NetCON6_1: CON6.1 D16.1 | length 168.9
  Bottom Layer w20: CON6.1 1338.74,3496.57 1349.32,3496.57 1350.46,3497.71 D16.1@1410,3497.71
NetCON6_2: CON6.2 R28.2 U11.2 | length 338.6
  Bottom Layer w20: CON6.2 1310,3187.71 1500,3187.71 1505,3182.71 1563.28,3182.71 1563.28,3194.05 1571.98,3202.75 R28.2@1575,3202.75
NetCON7_1: CON7.1 D20.1 | length 168.9
  Bottom Layer w20: CON7.1 1338.74,3071.03 1349.32,3071.03 1350.46,3072.17 D20.1
NetCON7_2: CON7.2 R32.2 U12.2 | length 338.6
  Bottom Layer w20: CON7.2 1310,2762.17 U12.2 1505,2757.17 1563.28,2757.17 1563.28,2768.51 1571.98,2777.21 R32.2@1575,2777.21
NetCON8_1: CON8.1 D23.1 | length 168.9
  Bottom Layer w20: CON8.1 1338.74,2645.49 1349.32,2645.49 1350.46,2646.62 D23.1@1410,2646.62
NetCON8_2: CON8.2 R36.2 U13.2 | length 338.6
  Bottom Layer w20: CON8.2 1310,2336.62 1500,2336.62 1505,2331.62 1563.28,2331.62 1563.28,2342.96 1571.98,2351.66 R36.2
NetCON9_1: CON9.1 D26.1 | length 168.9
  Bottom Layer w20: CON9.1 1338.74,2219.95 1349.32,2219.95 1350.46,2221.08 D26.1
NetCON9_2: CON9.2 R41.2 U14.2 | length 338.6
  Bottom Layer w20: CON9.2 1310,1911.08 U14.2 1505,1906.08 1563.28,1906.08 1563.28,1917.42 1571.98,1926.12 R41.2@1575,1926.12
NetCON10_1: CON10.1 D28.1 | length 168.9
  Bottom Layer w20: CON10.1 1338.74,1794.41 1349.32,1794.41 1350.46,1795.54 D28.1@1410,1795.54
NetCON10_2: CON10.2 R44.2 U15.2 | length 338.6
  Bottom Layer w20: CON10.2 1310,1485.54 1500,1485.54 1505,1480.54 1563.28,1480.54 1563.28,1491.88 1571.98,1500.58 R44.2
NetCON11_1: CON11.1 D30.1 | length 168.9
  Bottom Layer w20: CON11.1 1338.74,1368.87 1349.32,1368.87 1350.46,1370 D30.1
NetCON11_2: CON11.2 R47.2 U16.2 | length 338.6
  Bottom Layer w20: CON11.2 1310,1060 U16.2 1505,1055 1563.28,1055 1563.28,1066.34 1571.98,1075.04 R47.2
NetD1_1: D1.1 R6.1 | length 81.6
  Bottom Layer w20: D1.1 4115,2438.33 R6.1
NetD2_1: D2.1 U1.38 U4.3 | length 2183.8
  Bottom Layer w12: 2800,3710 2800,3685 2825,3660 2880,3660 2900.87,3639.13 U1.38
  Bottom Layer w20: U4.3@1800.13,4889.87 U4.3 1802,4890 1846.99,4845 2001,4845 ; D2.1 2001,4946 2001,4845 ; 2345,4730 2335,4740 2260,4740 2155,4845 2001,4845 ; 2347.5,4732.5 2350,4730 2350,4170 2532.5,3987.5 2552.5,3987.5 2800,3740 2800,3710
NetD2_2: D2.2 R8.2 | length 79.9
  Bottom Layer w20: R8.2 1937,5063.78 1940.78,5060 1995,5060 D2.2
NetD3_2: D3.2 R5.1 | length 62.8
  Bottom Layer w20: R5.1@1410,5034.87 D3.2@1410,5097.67
NetD4_1: D4.1 R9.1 | length 81.1
  Bottom Layer w20: D4.1 4115,2907.78 R9.1
NetD5_1: D5.1 U1.33 U7.3 | length 2229.5
  Bottom Layer w12: 2490,3430 2490.31,3429.69 U1.33
  Bottom Layer w20: U7.3@1800,4464.33 2005,4464.33 D5.1@2005,4529.33 ; U7.3 2005,4464.44 2150.56,4464.44 2280,4335 2280,3480 2330,3430 2490,3430
NetD5_2: D5.2 R12.2 | length 273.7
  Bottom Layer w20: R12.2@1752,4679.33 1955,4679.33 D5.2@2005,4629.33
NetD6_1: D6.1 R13.1 | length 80.5
  Bottom Layer w20: D6.1 4115,3377.22 R13.1
NetD7_2: D7.2 R10.1 | length 62.8
  Bottom Layer w20: R10.1@1410,4609.33 D7.2@1410,4672.13
NetD8_1: D8.1 R19.1 | length 80
  Bottom Layer w20: D8.1 4115,3846.67 R19.1
NetD9_1: D9.1 U1.32 U8.3 | length 1859.5
  Bottom Layer w12: 2485,3385 2540,3385 2565,3410 U1.32
  Bottom Layer w20: U8.3@1800,4038.79 2005,4038.79 D9.1@2005,4103.79 ; U8.3 2116.11,4038.89 2220,3935 2220,3460 2295,3385 2485,3385
NetD9_2: D9.2 R21.2 | length 273.7
  Bottom Layer w20: R21.2@1752,4253.79 1955,4253.79 D9.2@2005,4203.79
NetD10_2: D10.2 R18.1 | length 62.8
  Bottom Layer w20: R18.1@1410,4183.79 D10.2@1410,4246.59
NetD11_1: D11.1 R23.1 | length 79.4
  Bottom Layer w20: D11.1 4115,4316.11 R23.1
NetD12_1: D12.1 U1.31 U10.3 | length 1519
  Bottom Layer w12: 2490,3340 2545,3340 2595.32,3390.32 U1.31
  Bottom Layer w20: U10.3@1800,3613.25 2005,3613.25 D12.1@2005,3678.25 ; U10.3 2136.67,3613.33 2165,3585 2165,3440 2265,3340 2490,3340
NetD12_2: D12.2 R25.2 | length 273.7
  Bottom Layer w20: R25.2@1752,3828.25 1955,3828.25 D12.2@2005,3778.25
NetD13_2: D13.2 R22.1 | length 62.8
  Bottom Layer w20: R22.1@1410,3758.25 D13.2@1410,3821.04
NetD14_1: D14.1 R26.1 | length 78.8
  Bottom Layer w20: D14.1 4115,4785.56 R26.1
NetD15_1: D15.1 U1.30 U11.3 | length 1375.7
  Bottom Layer w12: 2490,3290 2545,3290 2625.63,3370.63 U1.30
  Bottom Layer w20: U11.3@1800,3187.71 2005,3187.71 D15.1@2005,3252.71 ; U11.3 2175,3187.78 2277.22,3290 2490,3290
NetD15_2: D15.2 R29.2 | length 273.7
  Bottom Layer w20: R29.2@1752,3402.71 1955,3402.71 D15.2@2005,3352.71
NetD16_2: D16.2 R27.1 | length 62.8
  Bottom Layer w20: R27.1@1410,3332.71 D16.2@1410,3395.5
NetD17_1: D17.1 R30.1 | length 78.3
  Bottom Layer w20: D17.1 4115,5255 R30.1
NetD18_1: D18.1 U1.29 U12.3 | length 1658.1
  Bottom Layer w12: 2460,3205 2515,3205 2660.94,3350.94 U1.29
  Bottom Layer w20: U12.3 2005,2762.17 D18.1@2005,2827.17 ; U12.3 2005,2762.22 2162.22,2762.22 2200,2800 2200,2995 2410,3205 2460,3205
NetD18_2: D18.2 R33.2 | length 273.7
  Bottom Layer w20: R33.2 1955,2977.17 D18.2@2005,2927.17
NetD19_1: D19.1 R34.1 | length 85.4
  Bottom Layer w20: D19.1 4115,1035 R34.1
NetD20_2: D20.2 R31.1 | length 62.8
  Bottom Layer w20: R31.1 D20.2
NetD21_1: D21.1 U1.28 U13.3 | length 2028.3
  Bottom Layer w12: 2455,3145 2500,3145 2686.26,3331.26 U1.28
  Bottom Layer w20: U13.3@1800,2336.62 2005,2336.62 D21.1@2005,2401.62 ; U13.3 2005,2336.67 2166.67,2336.67 2255,2425 2255,2965 2435,3145 2455,3145
NetD21_2: D21.2 R38.2 | length 273.7
  Bottom Layer w20: R38.2@1752,2551.62 1955,2551.62 D21.2@2005,2501.62
NetD22_1: D22.1 R37.1 | length 82.7
  Bottom Layer w20: D22.1 4115,1499.44 R37.1
NetD23_2: D23.2 R35.1 | length 62.8
  Bottom Layer w20: R35.1@1410,2481.62 D23.2@1410,2544.42
NetD24_1: D24.1 R40.1 | length 82.2
  Bottom Layer w20: D24.1 4115,1968.89 R40.1
NetD25_1: D25.1 U1.27 U14.3 | length 2231.8
  Bottom Layer w12: 2462.5,3085 2485,3085 2711.57,3311.57 U1.27
  Bottom Layer w20: U14.3 1962.34,1911.11 1978.01,1926.78 2005,1926.78 ; D25.1@2005,1976.08 2005,1926.78 ; 2462.5,3085 2450,3085 2310,2945 2310,1990 2231.11,1911.11 2079.66,1911.11 2063.99,1926.78 2005,1926.78
NetD25_2: D25.2 R42.2 | length 273.7
  Bottom Layer w20: R42.2 1955,2126.08 D25.2@2005,2076.08
NetD26_2: D26.2 R39.1 | length 62.8
  Bottom Layer w20: R39.1 D26.2
NetD27_1: D27.1 U1.26 U15.3 | length 2771.3
  Bottom Layer w12: 2467.5,3017.5 2741.89,3291.89 U1.26
  Bottom Layer w20: D27.1@2005,1550.54 2005,1485.54 ; 2467.5,3017.5 2365,2915 2365,1680.56 2170,1485.56 2005,1485.56 ; 2005,1485.56 U15.3 2005,1485.54
NetD27_2: D27.2 R45.2 | length 273.7
  Bottom Layer w20: R45.2@1752,1700.54 1955,1700.54 D27.2@2005,1650.54
NetD28_2: D28.2 R43.1 | length 62.8
  Bottom Layer w20: R43.1@1410,1630.54 D28.2@1410,1693.34
NetD29_1: D29.1 U1.25 U16.3 | length 2969.1
  Bottom Layer w12: 2482.5,2937.5 2532.5,2987.5 2532.5,3032.5 2772.2,3272.2 U1.25
  Bottom Layer w20: U16.3 2005,1060 ; D29.1 2005,1060 ; 2482.5,2937.5 2415,2870 2415,1280 2195,1060 2005,1060
NetD29_2: D29.2 R48.2 | length 273.7
  Bottom Layer w20: R48.2 1955,1275 D29.2
NetD30_2: D30.2 R46.1 | length 62.8
  Bottom Layer w20: R46.1 D30.2
NetD31_1: D31.1 R17.1 | length 82.1
  Bottom Layer w20: D31.1 3020,4570 R17.1
NetR5_2: R5.2 R7.1 U4.1 | length 188.2
  Bottom Layer w20: R5.2@1410,4969.91 1480.04,4969.91 1500,4989.87 1563.28,4989.87 1563.28,4978.58 1571.98,4969.87 R7.1@1575,4969.87
NetR10_2: R10.2 R11.1 U7.1 | length 188.2
  Bottom Layer w20: R10.2 1480.04,4544.37 1500,4564.33 1563.28,4564.33 1563.28,4553.03 1571.98,4544.33 R11.1@1575,4544.33
NetR14_1: R14.1 U1.42 U5.6 | length 456.5
  Bottom Layer w12: U1.42 2979.61,3629.61 3005,3655
  Bottom Layer w15: 3005,3655 3050,3700 R14.1 U5.6 3051.65,3925.83 3051.65,3888.35
NetR15_1: R15.1 U1.43 U5.5 | length 431.9
  Bottom Layer w12: U1.43 2999.29,3589.29 3065,3655
  Bottom Layer w20: 3065,3655 3103.16,3693.16 R15.1 3103.16,3836.84 3100,3840 U5.5
NetR16_1: R16.1 SW1.1 U1.2 | length 1673.5
  Bottom Layer w10: U1.2 3219.06,3469.06 3265,3515 3265,3645 3240,3670 3240,3760
  Bottom Layer w20: SW1.1 2730,4395 2790,4335 3160,4335 3240,4255 3240,3760
NetR18_2: R18.2 R20.1 U8.1 | length 188.2
  Bottom Layer w20: R18.2@1410,4118.83 1480.04,4118.83 1500,4138.79 1563.28,4138.79 1563.28,4127.49 1571.98,4118.79 R20.1@1575,4118.79
NetR22_2: R22.2 R24.1 U10.1 | length 188.2
  Bottom Layer w20: R22.2 1480.04,3693.29 1500,3713.25 1563.28,3713.25 1563.28,3701.95 1571.98,3693.25 R24.1@1575,3693.25
NetR27_2: R27.2 R28.1 U11.1 | length 188.2
  Bottom Layer w20: R27.2@1410,3267.75 1480.04,3267.75 1500,3287.71 1563.28,3287.71 1563.28,3276.41 1571.98,3267.71 R28.1@1575,3267.71
NetR31_2: R31.2 R32.1 U12.1 | length 188.2
  Bottom Layer w20: R31.2 1480.04,2842.21 U12.1 1563.28,2862.17 1563.28,2850.87 1571.98,2842.17 R32.1
NetR35_2: R35.2 R36.1 U13.1 | length 188.2
  Bottom Layer w20: R35.2 1480.04,2416.66 1500,2436.62 1563.28,2436.62 1563.28,2425.33 1571.98,2416.62 R36.1@1575,2416.62
NetR39_2: R39.2 R41.1 U14.1 | length 188.2
  Bottom Layer w20: R39.2 1480.04,1991.12 U14.1 1563.28,2011.08 1563.28,1999.78 1571.98,1991.08 R41.1
NetR43_2: R43.2 R44.1 U15.1 | length 188.2
  Bottom Layer w20: R43.2 1480.04,1565.58 1500,1585.54 1563.28,1585.54 1563.28,1574.24 1571.98,1565.54 R44.1@1575,1565.54
NetR46_2: R46.2 R47.1 U16.1 | length 188.2
  Bottom Layer w20: R46.2 1480.04,1140.04 U16.1 1563.28,1160 1563.28,1148.7 1571.98,1140 R47.1
NetU1_13: U1.13 U6.7 | length 476.2
  Bottom Layer w12: U1.13 3097.72,3172.28 3105,3165 3145,3165 3295,3015 3295,2973.75
  Bottom Layer w20: 3295,2973.75 3295,2960 3330,2925 U6.7
NetU1_14: U1.14 U6.6 | length 531.7
  Bottom Layer w12: U1.14 3078.03,3151.97 3095,3135 3120.56,3135 3235,3020.56 3235,2960 3267.5,2927.5
  Bottom Layer w20: 3267.5,2927.5 3320,2875 U6.6
NetU1_15: U1.15 U6.5 | length 586.6
  Bottom Layer w12: 3058.35,3135.97 3089.31,3105 ; U1.15 3058.35,3191.68 3059.03,3191 3059.03,3135.97 ; 3090,3105 3100,3105 3195,3010 3195,2940 3235,2900
  Bottom Layer w20: 3235,2900 3310,2825 U6.5
NetU1_16: U1.16 U6.4 | length 650.6
  Bottom Layer w12: U1.16 3038.66,3116.34 3157.22,2997.78 3157.22,2907.78 3187.5,2877.5
  Bottom Layer w20: 3187.5,2877.5 3290,2775 U6.4
NetU1_17: U1.17 U6.3 | length 723.4
  Bottom Layer w12: U1.17 3018.98,3095.73 3117.78,2996.93 3117.78,2872.22 3160,2830
  Bottom Layer w20: 3160,2830 3265,2725 U6.3
NetU1_18: U1.18 U6.2 | length 793.3
  Bottom Layer w12: U1.18 2999.29,3080.71 3078.33,3001.67 3078.33,2841.67 3127.5,2792.5
  Bottom Layer w20: 3127.5,2792.5 3245,2675 U6.2
NetU1_19: U1.19 U6.1 | length 863.2
  Bottom Layer w12: U1.19 2979.61,3065.39 3038.89,3006.11 3038.89,2811.11 3095,2755
  Bottom Layer w20: 3095,2755 3225,2625 U6.1
NetU1_20: U1.20 U9.7 | length 967.6
  Bottom Layer w12: U1.20 2959.92,3050.08 2999.44,3010.56 2999.44,2775.56 3075,2700
  Bottom Layer w20: 3075,2700 3275,2500 U9.7
NetU1_21: U1.21 U9.6 | length 1043.3
  Bottom Layer w12: U1.21 2940.24,3034.76 2960,3015 2960,2735 3075,2620
  Bottom Layer w20: 3075,2620 3245,2450 U9.6
NetU1_22: U1.22 U9.5 | length 1119
  Bottom Layer w12: U1.22 2920.55,3168.38 2921.18,3167.75 2921.18,2693.82 2940,2675 3012.5,2602.5
  Bottom Layer w20: 3012.5,2602.5 3215,2400 U9.5
Nrest: R2.1 U1.7 | length 409.7
  Bottom Layer w10: U1.7 3254.37,3370.63 3360,3265 3360,3200.86 3372.16,3188.7 3426.3,3188.7 R2.1
OUT1-: CON12.2 D1.2 U6.16 | length 1005.8
  Bottom Layer w20: U6.16 3910,2625 ; D1.2@3995,2445 3995,2540 3910,2625 ; CON12.2 3910,2341.67 3910,2625
OUT2-: CON14.2 D4.2 U6.15 | length 666.3
  Bottom Layer w20: U6.15 3855,2675 3952.5,2772.5 ; D4.2@3995,2886.67 3995,2815 3952.5,2772.5 ; CON14.2 4035,2690 3952.5,2772.5
OUT3-: CON16.2 D6.2 U6.14 | length 1097.2
  Bottom Layer w20: U6.14 3835,2725 3925,2815 3925,3160 ; D6.2 3989.49,3351.72 3936.72,3351.72 3925,3340 3925,3160 ; CON16.2 4029.44,3160 3925,3160
OUT4-: CON18.2 D8.2 U6.13 | length 1558.3
  Bottom Layer w20: U6.13 3795,2775 3875,2855 3875,3620 ; D8.2 3915,3826.67 3875,3786.67 3875,3620 ; CON18.2 4031.67,3620 3875,3620
OUT5-: CON20.2 D11.2 U6.12 | length 2029.8
  Bottom Layer w20: U6.12 3760,2825 3825,2890 3825,4095 ; D11.2 3876.11,4296.11 3825,4245 3825,4095 ; CON20.2 4032.22,4095 3825,4095
OUT6-: CON13.2 D14.2 U6.11 | length 2500
  Bottom Layer w20: U6.11 3710,2875 3775,2940 3775,4565 ; D14.2 3825.56,4765.56 3775,4715 3775,4565 ; CON13.2 4031.11,4565 3775,4565
OUT7-: CON15.2 D17.2 U6.10 | length 2927.1
  Bottom Layer w20: U6.10 3690,2925 3725,2960 3725,5030 ; D17.2 3875,5235 3725,5085 3725,5030 ; CON15.2 3725,5030
OUT8-: CON17.2 D19.2 U9.16 | length 1833.3
  Bottom Layer w20: U9.16 3580.69,2199.31 3629.03,2199.31 3830,1998.33 3830,1015 ; D19.2 3985,1015 3830,1015 ; CON17.2 4025.95,819.05 3915.95,819.05 3830,905 3830,1015
OUT9-: CON19.2 D22.2 U9.15 | length 1354.4
  Bottom Layer w20: U9.15 3663.33,2250 3905,2008.33 3905,1470 ; D22.2 3985.56,1470 3905,1470 ; CON19.2 4033.89,1280 3945,1280 3905,1320 3905,1470
OUT10-: CON21.2 D24.2 U9.14 | length 810
  Bottom Layer w20: U9.14 3698.33,2300 3995,2003.33 3995,1788.86 4035,1748.86 CON21.2
SWCLK: P1.3 R3.1 U1.37 | length 453.9
  Bottom Layer w10: 2760,3610 2860,3610 2881.18,3588.82 U1.37
  Bottom Layer w20: R3.1 P1.3 2760,3610
SWDIO: P1.4 R4.1 U1.34 | length 520
  Bottom Layer w10: 2655,3485 2690.63,3449.37 U1.34
  Bottom Layer w20: R4.1 2415,3526.72 2431.72,3510 P1.4 ; P1.4@2580,3485 2655,3485
XTAL1_IN: C8.1 R1.1 U1.5 Y1.1 | length 448.1
  Bottom Layer w10: U1.5 3280,3410 3340,3470 Y1.1
  Bottom Layer w20: R1.1 Y1.1 3442.5,3467.5 3502.5,3467.5 C8.1
XTAL1_OUT: C3.1 R1.2 U1.6 Y1.2 | length 478
  Bottom Layer w10: U1.6 3279.68,3390.32 3395.42,3274.58 3435.42,3274.58 Y1.2
  Bottom Layer w20: R1.2 Y1.2 3442.5,3267.5 3502.54,3267.5 C3.1
pads on no net: M1.S M2.S M3.S M4.S U1.4 U1.10 U1.11 U1.12 U1.39 U1.40 U1.41 U1.45 U1.46 U9.1 U9.2 U9.3 U9.4 U9.10 U9.11 U9.12 U9.13
copper on no net: | length 353.2
  Bottom Layer w10: 3148.9,3429.69 3264.69,3429.69 3295,3460 3330,3495 3330,3640

## Polygon pours and split planes (outlines as drawn)
GND on Bottom Layer "GND_L02_P000" (solid, remove dead copper, pour order 0): 4255,5395 4255,680 1000,680 1000,5395

## Keep-outs
Keep-Out Layer:
  the board outline again, w10

## Other copper
Bottom Layer:
  text "09131484530" at 3567,4427 h60 r90
  text "JAVAN" at 3682,1443 h60
  text "ELECTRONIC" at 3687,1328 h60
  text "99.9.2" at 3687,1213 h60
  text "TELL ASSISTANT" at 3717,1088 h60